# Altium PCB NeoGBP_Design_PCB.pcbdoc
Units mm, origin at the board's own origin, x right, y up, seen from the top; angles counter-clockwise.
Board outline 75.18 x 89.11 mm, 2 copper layers (Top Layer, Bottom Layer); 16 components, 27 nets, 123 pads, 8 vias.
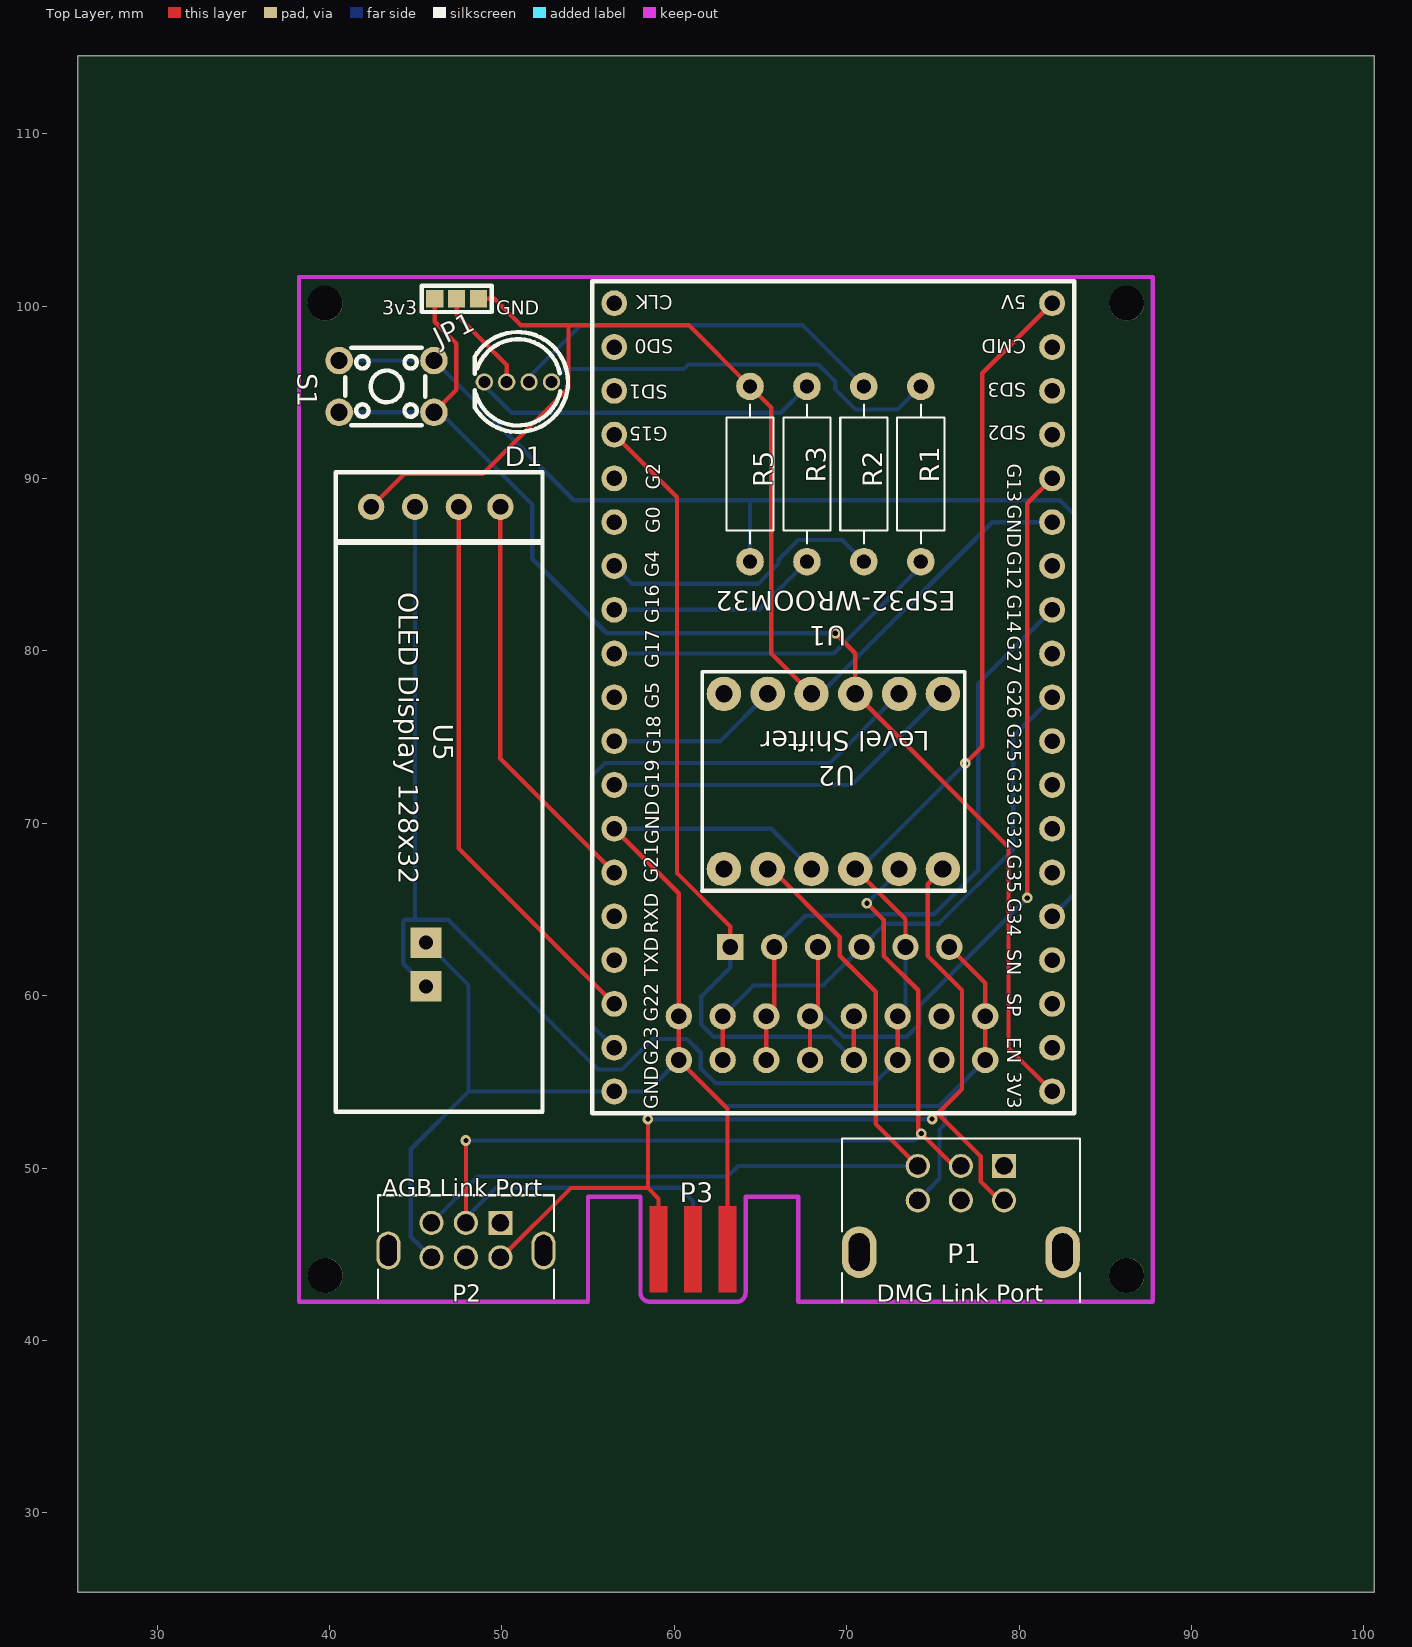
[diagram p0: Top Layer view]
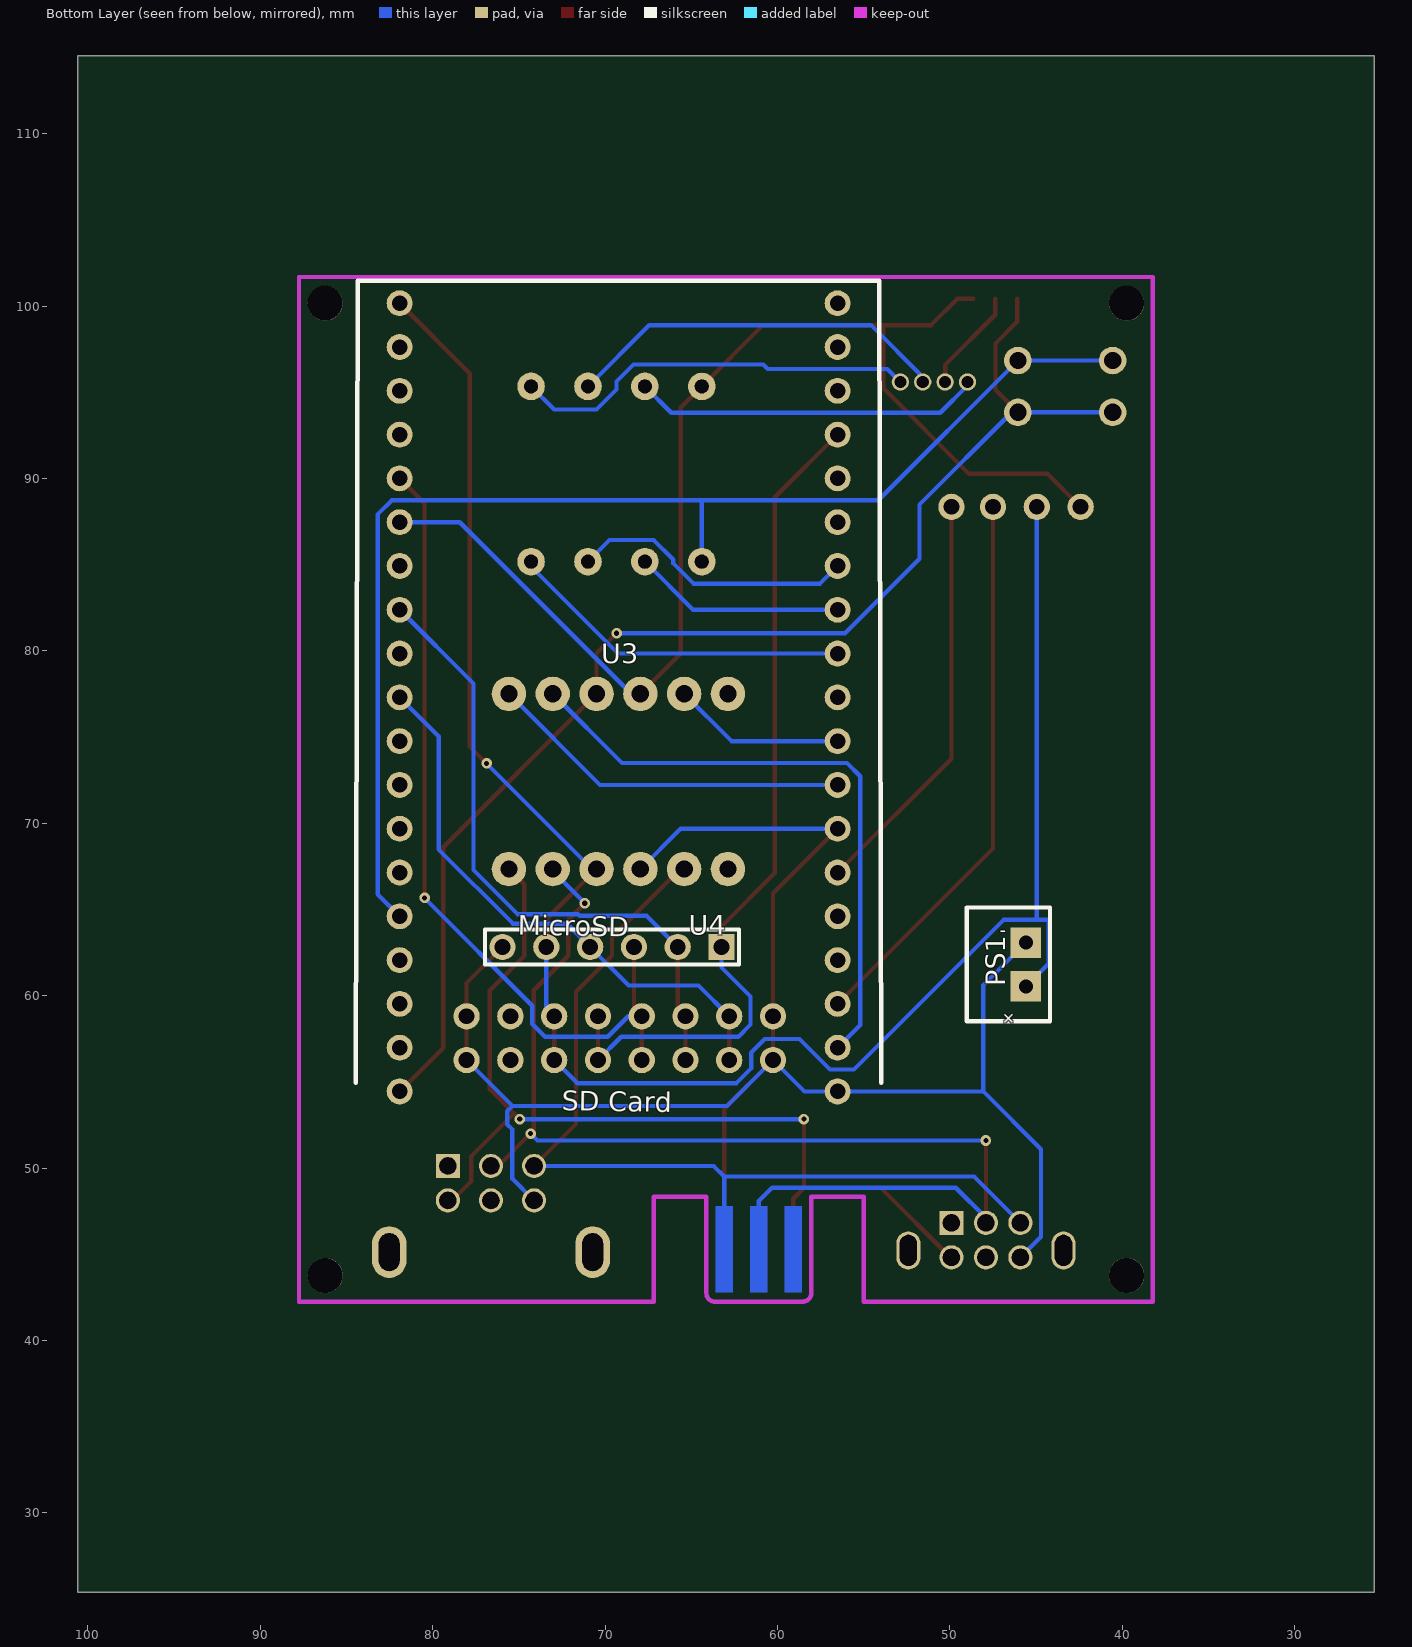
[diagram p1: Bottom Layer view, seen from below]

## Layer stack, top to bottom
Top Layer: signal copper (thickness not stored)
Dielectric: dielectric 0.32, FR-4, Dk 4.8
Bottom Layer: signal copper (thickness not stored)

## Board outline
100.584,25.4 25.4,25.4 25.4,114.514 100.584,114.514

## Components (designator, comment, footprint, x,y, rotation, side; value= is the part's Value field where it differs from the comment)
D1 "φ5 RGB Transparent" LED-TH_4P-BD5.8-P1.30 50.927,95.591 r180 top
JP1 "LED Jumper" JUMPERPAD_3 47.371,100.417 r180 top
P1 "GameBoy_LinkPort" GAMEBOY_LINKPORT_DMG_HORIZONTAL 79.121,50.125 r270 top
P2 "GameBoy_LinkPort" GAMEBOY_LINKPORT_MGB_HORIZONTAL 49.911,46.823 r270 top
P3 "gb-link-socket" GB-LINK-SOCKET 61.087,45.299 r0 top
PS1 "BatteryPins" BATTERYPAD 45.593,61.809 r270 bottom
R1 "220 Resistor" R_AXIAL_DIN0207_L6.3MM_D2.5MM_P10.16MM_HORIZONTAL#1 73.025,91.527 r0 top
R2 "220 Resistor" R_AXIAL_DIN0207_L6.3MM_D2.5MM_P10.16MM_HORIZONTAL#2 72.263,91.527 r0 top
R3 "220 Resistor" R_AXIAL_DIN0207_L6.3MM_D2.5MM_P10.16MM_HORIZONTAL#2 68.961,91.527 r0 top
R5 "10k Resistor" R_AXIAL_DIN0207_L6.3MM_D2.5MM_P10.16MM_HORIZONTAL#1 65.659,88.987 r180 top
S1 "TS-KG09" SW-TH_4P-L4.5-W4.5-P3.00-LS5.5 43.307,95.337 r180 top
U1 "ESP32WRoom32D" ESP32WROOM32D_SIMPLE 69.215,79.843 r180 top
U2 "Logical_Level_Shifter" "LOGIC_LEVEL BIDIRECTIONAL" 76.835,78.827 r270 top
U3 "41015739 SD Card Module" SD_CARD_MODULE_W/_SD_CARD_MODIFIED 78.105,56.221 r0 bottom
U4 "MICROSD CARD ADAPTER" "ANGELELIC MICROSD CARD MODULE" 70.869,62.825 r90 bottom
U5 "OLED_128x32" OLED-128X32 47.117,71.969 r270 top

## Footprints (in the part's own frame and the unit in brackets; to place one, negate y for a bottom-side part, rotate by r counter-clockwise, add the part's x,y. Pads: shape width x height; smd on the part's side, far side on the other; paste and mask are expansions set on the pad)
"ANGELELIC MICROSD CARD MODULE" [mil]
  rect 60x60 hole 36: 1(0,-300)
  round 60 hole 36: 2(0,-200) 3(0,-100) 4(0,0) 5(0,100) 6(0,200)
  silkscreen extent -40,-340 40,240
BATTERYPAD [mil]
  rect 70x70 hole 32: +VE(50,0) -VE(-50,0)
ESP32WROOM32D_SIMPLE [mm]
  round 1.5 hole 0.9: 1(-12.7,25.4) 2(-12.7,22.86) 3(-12.7,20.32) 4(-12.7,17.78) 5(-12.7,15.24) 6(-12.7,12.7) 7(-12.7,10.16) 8(-12.7,7.62) 9(-12.7,5.08) 10(-12.7,2.54) 11(-12.7,0) 12(-12.7,-2.54) 13(-12.7,-5.08) 14(-12.7,-7.62) 15(-12.7,-10.16) 16(-12.7,-12.7) 17(-12.7,-15.24) 18(-12.7,-17.78) 19(-12.7,-20.32) 20(12.7,25.4) 21(12.7,22.86) 22(12.7,20.32) 23(12.7,17.78) 24(12.7,15.24) 25(12.7,12.7) 26(12.7,10.16) 27(12.7,7.62) 28(12.7,5.08) 29(12.7,2.54) 30(12.7,0) 31(12.7,-2.54) 32(12.7,-5.08) 33(12.7,-7.62) 34(12.7,-10.16) 35(12.7,-12.7) 36(12.7,-15.24) 37(12.7,-17.78) 38(12.7,-20.32)
  silkscreen extent -13.97,-21.59 13.97,26.67
GAMEBOY_LINKPORT_DMG_HORIZONTAL [mm]
  rect 1.4x1.4 hole 1: 1(0,0)
  round 1.4 hole 1: 2(2,0) 3(0,-2.5) 4(2,-2.5) 5(0,-5) 6(2,-5)
  oval 3x2 hole 1.2 slot 2.2 at 0 deg: SH(5,3.4) SH(5,-8.4)
  silkscreen extent -1.6,-9.4 7.9,4.4
GAMEBOY_LINKPORT_MGB_HORIZONTAL [mm]
  rect 1.4x1.4 hole 1: 1(0,0)
  round 1.4 hole 1: 2(2,0) 3(0,-2) 4(2,-2) 5(0,-4) 6(2,-4)
  oval 2.2x1.4 hole 1 slot 1.8 at 0 deg: SH(1.6,2.5) SH(1.6,-6.5)
  silkscreen extent -1.6,-7.1 4.4,3.1
GB-LINK-SOCKET [mm]
  round 0 smd far side: 1(-2,0) 3(0,0) 5(2,0)
  round 0 smd: 2(-2,0) 4(0,0) 6(2,0)
  Top Layer region: -0.5,2.5 0.5,2.5 0.5,-2.5 -0.5,-2.5
  Top Layer region: 1.5,2.5 2.5,2.5 2.5,-2.5 1.5,-2.5
  Top Layer region: -2.5,2.5 -1.5,2.5 -1.5,-2.5 -2.5,-2.5
  Bottom Layer region: 1.5,2.5 2.5,2.5 2.5,-2.5 1.5,-2.5
  Bottom Layer region: -0.5,2.5 0.5,2.5 0.5,-2.5 -0.5,-2.5
  Bottom Layer region: -2.5,2.5 -1.5,2.5 -1.5,-2.5 -2.5,-2.5
JUMPERPAD_3 [mm]
  rect 1x1 smd: 1(-1.27,0) 2(0,0) 3(1.27,0)
  silkscreen extent -2.03,-0.76 2.03,0.76
LED-TH_4P-BD5.8-P1.30 [mm]
  round 1 hole 0.7: 1(1.95,0) 2(0.65,0) 3(-0.65,0) 4(-1.95,0)
  silkscreen extent -2.91,-2.9 2.51,2.9
"LOGIC_LEVEL BIDIRECTIONAL" [mm]
  round 2 hole 1: 1(11.481,-1.26) 2(11.481,-3.8) 3(11.481,-6.34) 4(11.481,-8.88) 5(11.481,-11.42) 6(11.481,-13.96) 7(1.321,-13.96) 8(1.321,-11.42) 9(1.321,-8.88) 10(1.321,-6.34) 11(1.321,-3.8) 12(1.321,-1.26)
  silkscreen extent 0.05,-15.23 12.75,0.01
OLED-128X32 [mil]
  round 60 hole 36: 1(-645,110) 2(-645,15) 3(-645,-85) 4(-645,-185)
  silkscreen extent -724,-266 737,206
R_AXIAL_DIN0207_L6.3MM_D2.5MM_P10.16MM_HORIZONTAL#1 [mil]
  round 62.99 hole 31.5 slot 31.7 at 90 deg: 1(49.99,-249.99) 2(49.99,150.01)
  silkscreen extent -4,-209 104,109
R_AXIAL_DIN0207_L6.3MM_D2.5MM_P10.16MM_HORIZONTAL#2 [mil]
  round 62.99 hole 31.5 slot 31.7 at 90 deg: 1(-50.01,-249.99) 2(-50.01,150.01)
  silkscreen extent -104,-209 4,109
SD_CARD_MODULE_W/_SD_CARD_MODIFIED [mil]
  round 60 hole 36: 1(-2.8,-101.7) 1(-2.8,-1.7) 2(-102.8,-101.7) 2(-102.8,-1.7) 3(-202.8,-101.7) 3(-202.8,-1.7) 4(-302.8,-101.7) 4(-302.8,-1.7) 5(-402.8,-101.7) 5(-402.8,-1.7) 6(-502.8,-101.7) 6(-502.8,-1.7) 7(-602.5,-101.7) 7(-602.5,-1.7) 8(-702.5,-101.7) 8(-702.5,-1.7)
  silkscreen extent -950,-1781 250,50
SW-TH_4P-L4.5-W4.5-P3.00-LS5.5 [mm]
  round 1.6 hole 1: 1(-2.75,1.5) 2(2.75,1.5) 3(-2.75,-1.5) 4(2.75,-1.5)
  silkscreen extent -2.25,-2.25 2.4,2.25

## Free pads (board coordinates)
  round 2.032 hole 2.032 unplated: ""(39.751,43.775) ""(39.751,100.163) ""(86.233,43.775) ""(86.233,100.163)

## Via types
v1: diameter 0.61, hole 0.305, Top Layer to Bottom Layer, tented both sides, 8 vias

## Nets (pads, with @x,y where several pads share a name; then routed paths per layer and width w, separated by ;. In a path a pad name is that pad's centre, name@x,y a point inside that pad or via, vN(x,y) a via of type N, cw(c..) or ccw(c..) an arc to the next point about the centre after c; other vN are vias at no path point)
3.3V: JP1.3 S1.1 S1.2 U1.1 U2.10 | length 75.4
  Top Layer w0.25: S1.1 47.359,95.139 47.359,97.828 46.101,99.087 JP1.3 ; v1(69.337,81.021) 70.495,79.862 U2.10 79.388,68.614 79.388,56.97 U1.1
  Bottom Layer w0.25: S1.2 S1.1 46.41,93.837 51.764,88.483 51.764,85.342 56.085,81.021 v1(69.337,81.021)
5V: PS1.+VE U1.19 U2.3 U3.3 U4.5 U5.3 | length 113.6
  Top Layer w0.25: U2.3 73.409,64.433 U4.5 ; U3.3@72.954,56.264 U3.3@72.954,58.804 ; v1(76.873,73.468) 77.858,74.452 77.858,96.106 U1.19
  Bottom Layer w0.25: U5.3 44.958,64.395 ; PS1.+VE 44.277,61.855 44.277,64.322 44.35,64.395 44.958,64.395 ; U2.3 70.752,67.346 v1(76.873,73.468) ; U3.3@72.954,56.264 71.616,54.926 62.379,54.926 61.531,55.774 61.531,56.688 60.738,57.482 58.728,57.482 56.959,55.713 55.569,55.713 46.888,64.395 44.958,64.395 ; U3.3@72.954,58.804 73.409,59.259 U4.5
BLUERGB: R1.1 U1.30 | length 20.2
  Bottom Layer w0.25: U1.30 69.247,79.843 74.295,84.891 R1.1
D1_1: D1.1 R3.2 | length 20.2
  Bottom Layer w0.25: D1.1 48.977,95.397 50.56,93.814 66.168,93.814 R3.2
D1_2: D1.2 JP1.2 | length 6
  Top Layer w0.25: JP1.2 47.371,99.492 50.277,96.586 D1.2
D1_3: D1.3 R2.2 | length 22.4
  Bottom Layer w0.25: D1.3 51.577,95.887 54.583,98.893 67.437,98.893 R2.2
GBSC: P1.5 P2.5 P3.5 U2.5 | length 54.7
  Top Layer w0.25: U2.5 65.646,67.346 69.599,63.393 69.599,62.316 71.684,60.231 71.684,52.562 P1.5
  Bottom Layer w0.25: P2.5 48.594,49.506 63.087,49.506 ; P3.5 63.087,49.506 ; P1.5 63.706,50.125 63.087,49.506
GBSI: P1.3 P2.3 P3.3 U2.2 | length 69.1
  Top Layer w0.25: P2.3 v1(47.911,51.599) ; v1(71.174,65.364) 72.139,64.4 72.139,62.316 74.143,60.312 74.143,52.184 v1(74.323,52.004) 76.201,50.125 P1.3
  Bottom Layer w0.25: P2.3 47.911,47.114 49.658,48.861 60.314,48.861 61.087,48.087 P3.3 ; v1(47.911,51.599) 73.919,51.599 v1(74.323,52.004) ; v1(71.174,65.364) 73.035,67.225 U2.2
GBSO: P1.2 P2.2 P3.2 U2.1 | length 57.7
  Top Layer w0.25: P2.2 49.981,44.823 54.001,48.843 58.468,48.843 ; v1(58.468,52.841) 58.468,48.843 ; P3.2 59.087,48.224 58.468,48.843 ; v1(74.951,52.841) 75.275,53.165 ; U2.1 74.694,66.465 74.694,62.3 76.683,60.312 76.683,54.573 75.275,53.165 ; P1.2 78.871,48.125 77.772,49.225 77.772,50.669 75.275,53.165
  Bottom Layer w0.25: v1(58.468,52.841) v1(74.951,52.841)
GND: JP1.1 P1.6 P2.6 P3.6 PS1.-VE R5.1 U1.14 U1.20 U1.26 U2.4 U2.9 U3.1 U3.8 U4.6 U5.4 | length 180.5
  Top Layer w0.25: U5.4 44.33,90.264 48.887,90.264 53.862,95.239 53.862,98.893 ; JP1.1 49.567,100.417 51.091,98.893 53.862,98.893 ; U1.26 60.261,65.936 60.261,58.804 60.261,56.264 63.087,53.439 P3.6 ; U2.9 65.616,79.845 65.616,94.11 R5.1 60.833,98.893 53.862,98.893 ; U4.6 78.034,60.74 78.034,58.804 U3.1@78.034,56.264
  Bottom Layer w0.25: PS1.-VE 48.06,60.612 48.06,54.443 ; P2.6 44.712,46.022 44.712,51.095 48.06,54.443 ; U1.26 65.618,69.683 U2.4 ; U2.9 68.478,77.506 78.435,87.463 U1.14 ; P1.6 75.378,49.382 75.378,52.233 75.682,52.537 75.682,53.291 75.371,53.601 ; U3.1@78.034,56.264 75.371,53.601 ; 48.06,54.443 U1.20 58.44,54.443 60.261,56.264 62.924,53.601 75.371,53.601
GREENRGB: R2.1 U1.32 | length 16.6
  Bottom Layer w0.25: U1.32 57.537,83.901 64.875,83.901 66.041,85.067 66.041,85.281 67.187,86.427 69.743,86.427 R2.1
MISO: U1.27 U2.12 | length 21.2
  Bottom Layer w0.25: U1.27 70.292,72.223 U2.12
MOSI: U1.21 U2.11 | length 36.1
  Bottom Layer w0.25: U1.21 55.201,58.297 55.201,72.721 55.973,73.493 69.022,73.493 U2.11
PUSHBUTTON: R5.2 S1.3 S1.4 U1.5 | length 73.7
  Bottom Layer w0.25: S1.4 S1.3 54.161,88.733 64.389,88.733 ; R5.2 64.389,88.733 ; U1.5 83.194,65.882 83.194,87.907 82.369,88.733 64.389,88.733
R1_2: D1.4 R1.2 | length 23.8
  Bottom Layer w0.25: D1.4 53.639,96.353 60.566,96.353 60.826,96.613 68.351,96.613 69.342,95.622 69.342,95.155 70.503,93.994 72.952,93.994 R1.2
REDRGB: R3.1 U1.31 | length 12.3
  Bottom Layer w0.25: U1.31 64.896,82.383 R3.1
S$120: 
S$25980: 
S$36638: 
S$162751: 
SCK: U1.28 U2.8 | length 10
  Bottom Layer w0.25: U1.28 62.672,74.763 U2.8
SCL: U1.22 U5.2 | length 32.6
  Top Layer w0.25: U5.2 47.498,68.54 U1.22
SDA: U1.25 U5.1 | length 23.9
  Top Layer w0.25: U5.1 49.911,73.747 U1.25
SDCS: U1.35 U3.4 U4.1 | length 50
  Top Layer w0.25: U1.35 60.154,88.904 60.154,67.107 63.249,64.012 U4.1 ; U3.4@70.414,56.264 U3.4@70.414,58.804
  Bottom Layer w0.25: U4.1 63.249,61.638 61.562,59.951 61.562,58.323 62.27,57.615 69.063,57.615 U3.4@70.414,56.264
SDMISO: U1.10 U3.7 U4.4 | length 33.2
  Top Layer w0.25: U3.7@62.801,56.264 U3.7@62.801,58.804
  Bottom Layer w0.25: U3.7@62.801,58.804 64.585,60.587 68.631,60.587 U4.4 72.223,64.179 75.348,64.179 79.656,68.486 79.656,75.044 U1.10
SDMOSI: U1.15 U3.5 U4.3 | length 48.7
  Top Layer w0.25: U3.5@67.874,56.264 67.874,58.804 68.329,59.259 U4.3 ; v1(80.473,65.668) 80.473,88.561 U1.15
  Bottom Layer w0.25: U3.5@67.874,58.804 68.654,58.804 69.843,57.615 73.485,57.615 74.224,58.354 74.224,59.419 v1(80.473,65.668)
SDSCK: U1.12 U3.6 U4.2 | length 37.3
  Top Layer w0.25: U3.6@65.334,56.264 65.334,58.804 65.789,59.259 U4.2
  Bottom Layer w0.25: U4.2 67.596,64.633 71.477,64.633 71.575,64.731 75.079,64.731 77.632,67.284 77.632,78.1 U1.12
pads on no net: P1.1 P1.4 P1.SH P2.1 P2.4 P2.SH P3.1 P3.4 U1.2 U1.3 U1.4 U1.6 U1.7 U1.8 U1.9 U1.11 U1.13 U1.16 U1.17 U1.18 U1.23 U1.24 U1.29 U1.33 U1.34 U1.36 U1.37 U1.38 U2.6 U2.7 U3.2

## Keep-outs
Keep-Out Layer:
  lines w0.254: 58.039,42.759 ccw(c58.539,42.759) 58.539,42.259 ; 63.627,42.251 ccw(c63.627,42.751) 64.127,42.751

## Silkscreen, mask and mechanical layers (free items; w line width, h text height)
Top Overlay:
  lines w0.254 net S$162751: 61.605,66.076 76.845,66.076
  text "3v3" at 43.053,99.509 h0.8
  text "GND" at 49.657,99.509 h0.8
  text "ESP32-WROOM32" at 76.327,83.462 h1.14 r180
  text "OLED Display 128x32" at 44.005,83.399 h1.14 r270
  text "Level Shifter" at 74.803,75.334 h1.14 r180
  text "AGB Link Port" at 43.053,48.355 h1
  text "DMG Link Port" at 71.755,42.259 h1
Bottom Overlay:
  lines w0.254 net S$25980: 44.196,58.507 44.196,65.111 49.022,65.111 49.022,58.507 44.196,58.507
  text "MicroSD" at 75.067,63.524 h1.14 r1

## Text inside footprints (layer, text, board x,y; h text height)
P1: Document "REF" at 75.421,39.925 h1
P2: Document "REF" at 46.711,40.823 h1
PS1: Bottom Overlay "+" at 47.132,58.746 h0.76 r45; Bottom Overlay "-" at 47.117,63.46 h0.76
U1: Top Overlay "CLK" at 59.9,100.618 h0.8 r180; Top Overlay "SD0" at 59.935,98.078 h0.8 r180; Top Overlay "SD1" at 59.607,95.443 h0.8 r180; Top Overlay "G15" at 59.607,92.998 h0.8 r180; Top Overlay "G2" at 59.182,89.355 h0.8 r90; Top Overlay "G0" at 59.182,86.815 h0.8 r90; Top Overlay "G4" at 59.129,84.27 h0.8 r90; Top Overlay "G16" at 59.129,81.603 h0.8 r90; Top Overlay "G17" at 59.129,78.999 h0.8 r90; Top Overlay "G5" at 59.129,76.655 h0.8 r90; Top Overlay "G18" at 59.201,74.001 h0.8 r90; Top Overlay "G19" at 59.129,71.443 h0.8 r90; Top Overlay "GND" at 59.129,68.776 h0.8 r90; Top Overlay "G21" at 59.055,66.557 h0.8 r90; Top Overlay "RXD" at 59.055,63.6 h0.8 r90; Top Overlay "TXD" at 59.055,61.122 h0.8 r90; Top Overlay "G22" at 59.055,58.501 h0.8 r90; Top Overlay "G23" at 59.055,55.961 h0.8 r90; Top Overlay "GND" at 59.055,53.421 h0.8 r90; Top Overlay "5V" at 80.415,100.618 h0.8 r180; Top Overlay "CMD" at 80.415,98.078 h0.8 r180; Top Overlay "SD3" at 80.415,95.538 h0.8 r180; Top Overlay "SD2" at 80.415,93.043 h0.8 r180; Top Overlay "G13" at 79.304,90.862 h0.8 r270; Top Overlay "GND" at 79.304,88.473 h0.8 r270; Top Overlay "G12" at 79.304,85.782 h0.8 r270; Top Overlay "G14" at 79.304,83.259 h0.8 r270; Top Overlay "G27" at 79.304,80.865 h0.8 r270; Top Overlay "G26" at 79.304,78.306 h0.8 r270; Top Overlay "G25" at 79.304,75.785 h0.8 r270; Top Overlay "G33" at 79.304,73.245 h0.8 r270; Top Overlay "G32" at 79.304,70.686 h0.8 r270; Top Overlay "G35" at 79.304,68.165 h0.8 r270; Top Overlay "G34" at 79.304,65.643 h0.8 r270; Top Overlay "SN" at 79.304,62.692 h0.8 r270; Top Overlay "SP" at 79.304,60.152 h0.8 r270; Top Overlay "EN" at 79.304,57.594 h0.8 r270; Top Overlay "3V3" at 79.304,55.592 h0.8 r270
U3: Bottom Overlay "SD Card" at 72.527,53.364 h1.14 r1